# Altium PCB Main.PcbDoc
Units mm, origin at the board's own origin, x right, y up, seen from the top; angles counter-clockwise.
Board outline 99 x 79 mm, 4 copper layers (Top Layer, Ground Layer, Power Layer, Bottom Layer), stack 1.591 mm thick; 37 components, 53 nets, 178 pads, 2 vias.
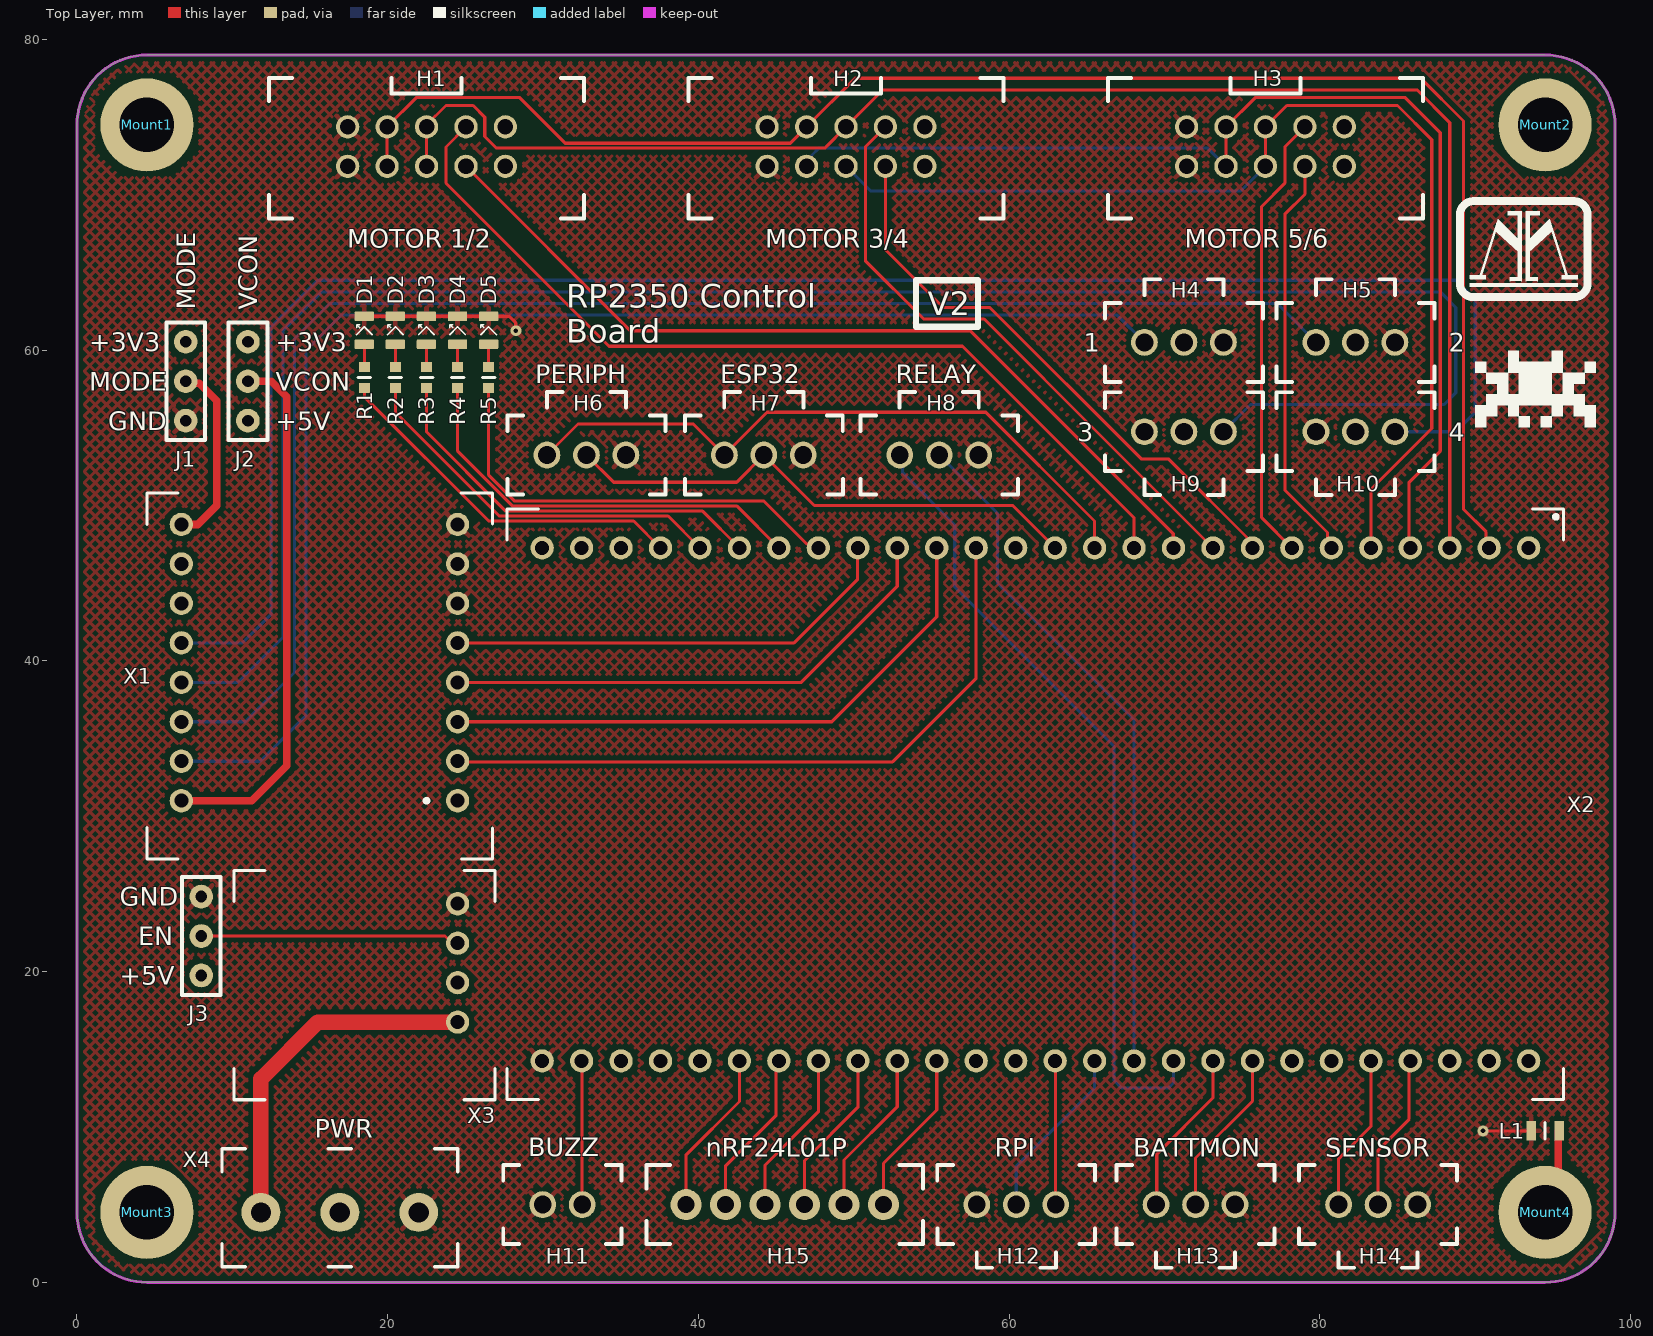
[diagram p0: Top Layer view]
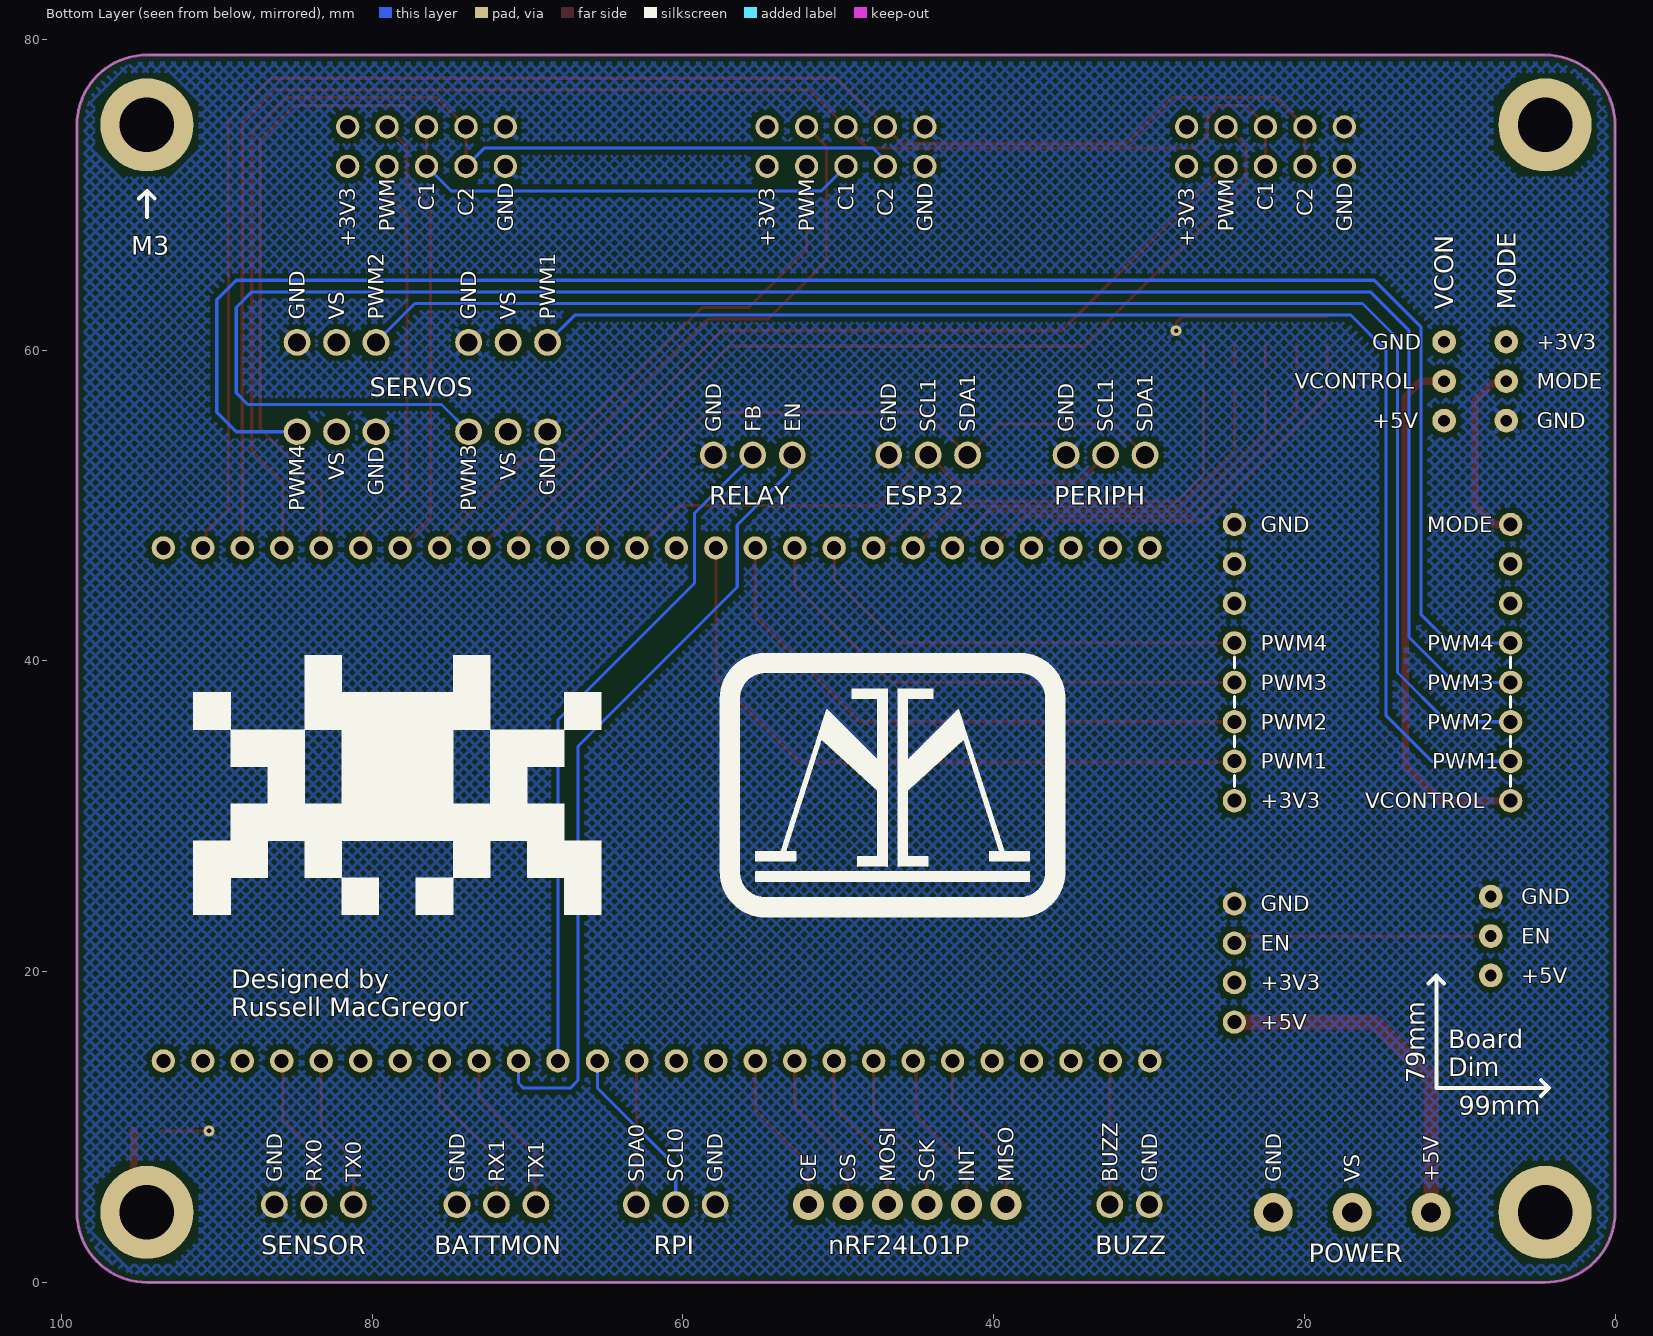
[diagram p1: Bottom Layer view, seen from below]
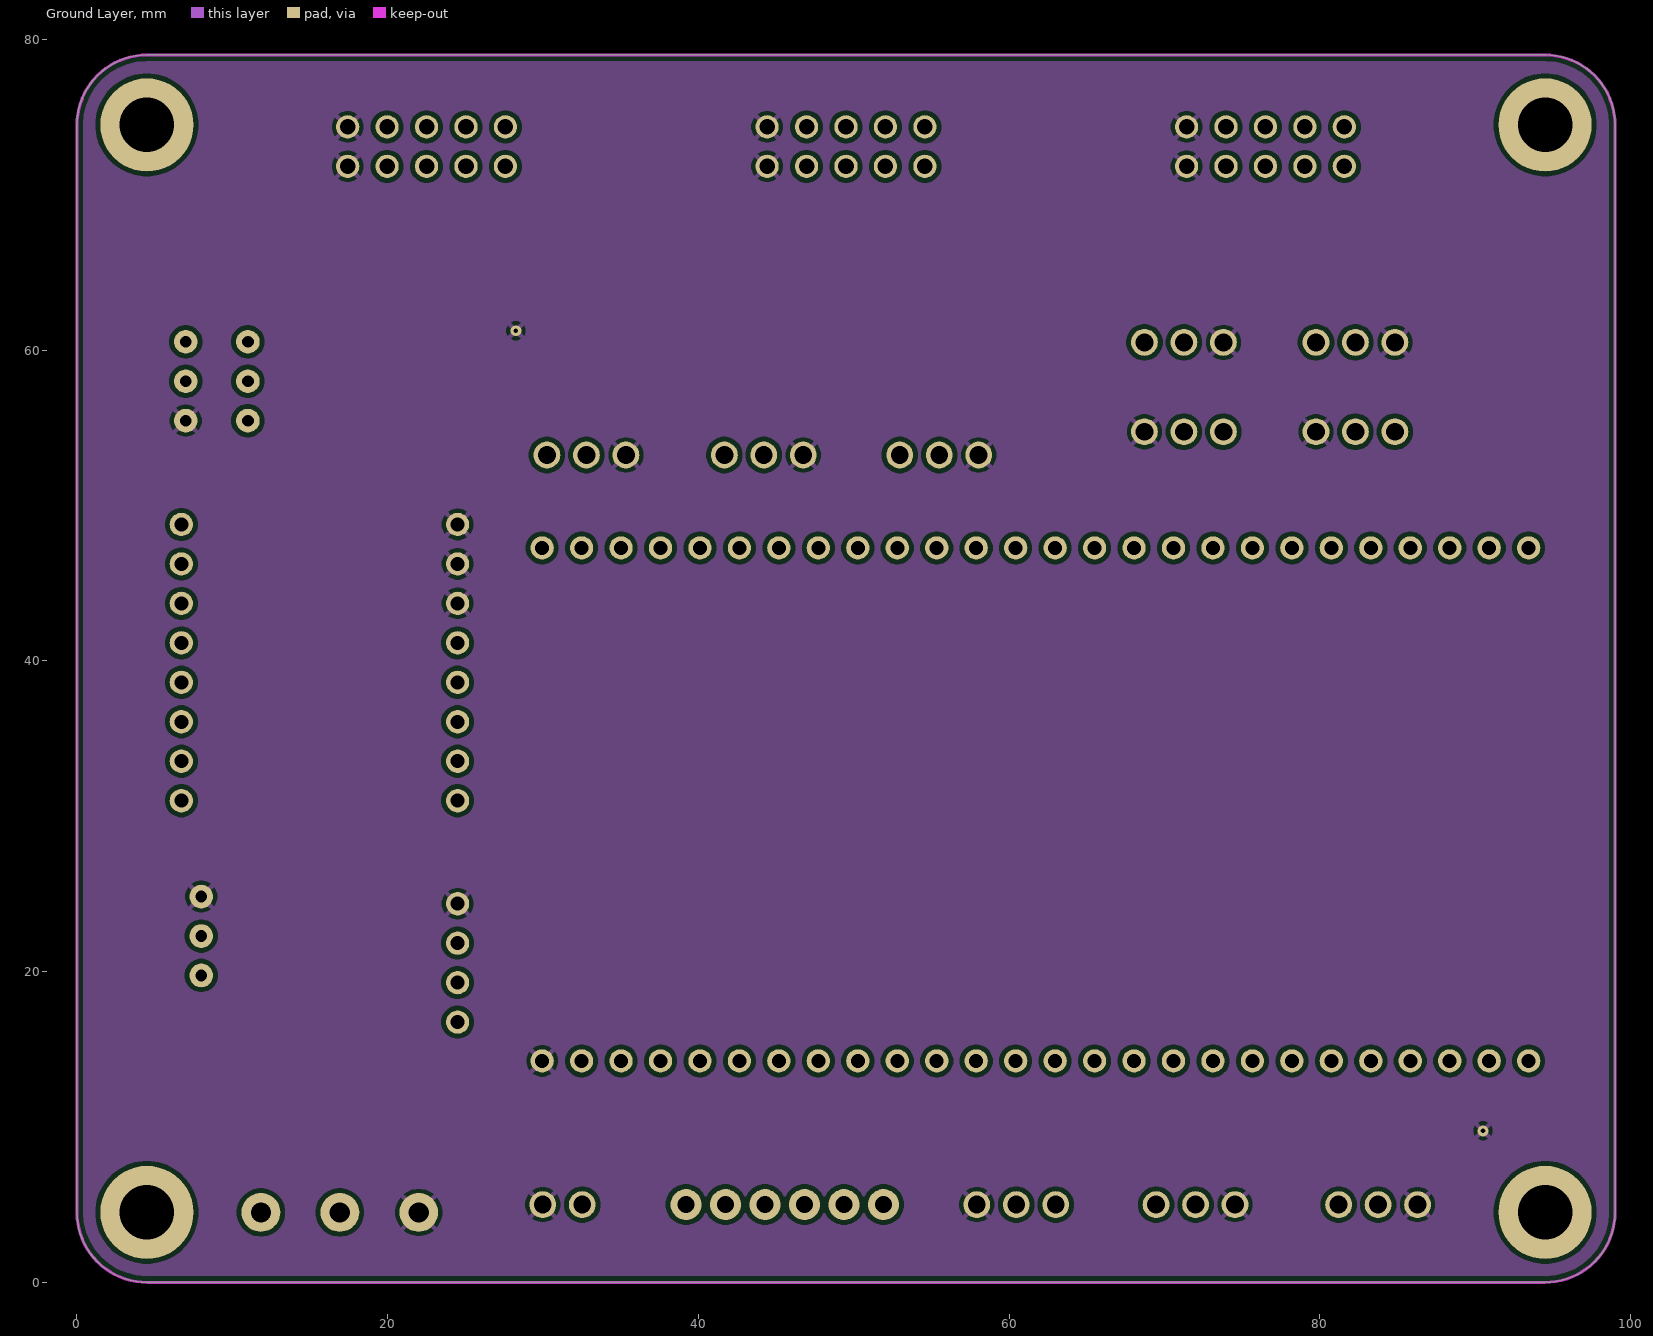
[diagram p2: Ground Layer]
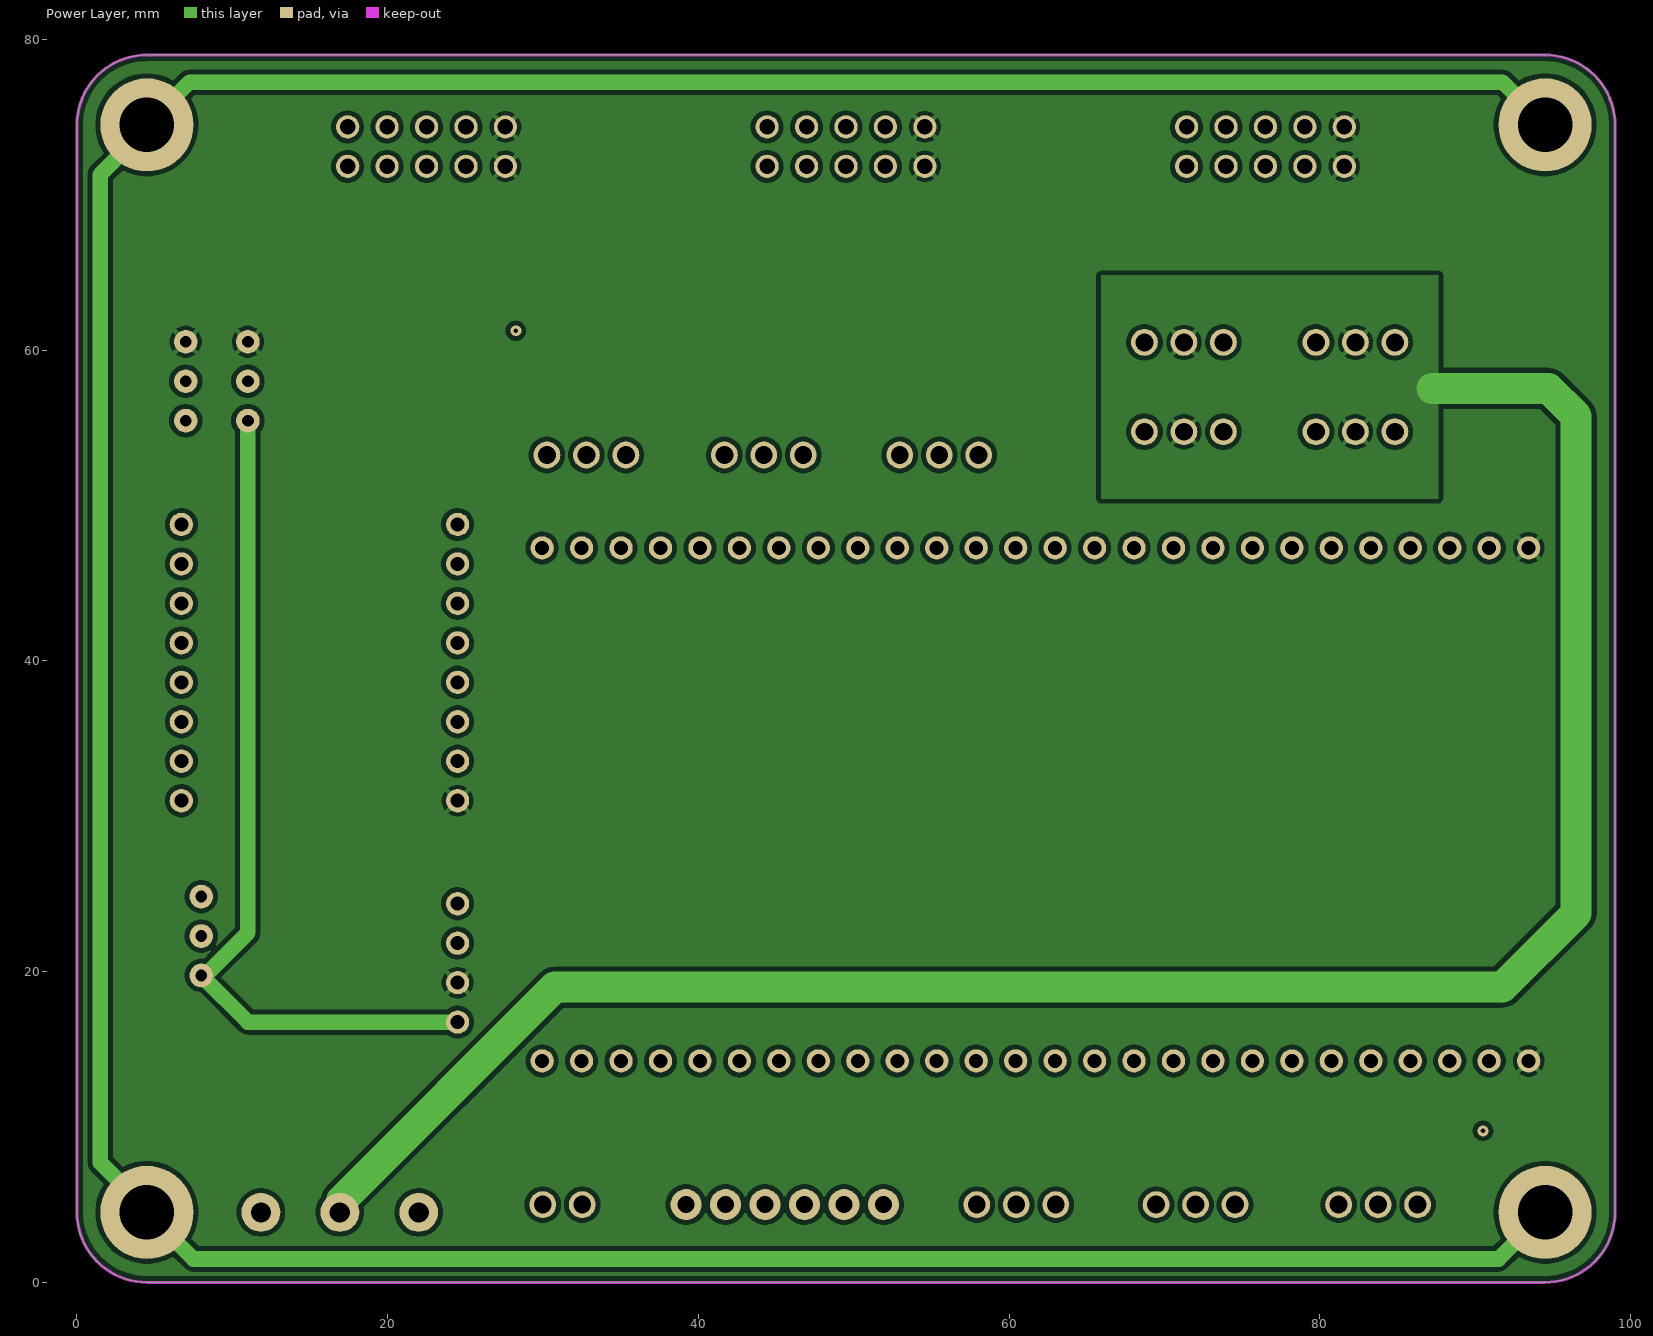
[diagram p3: Power Layer]
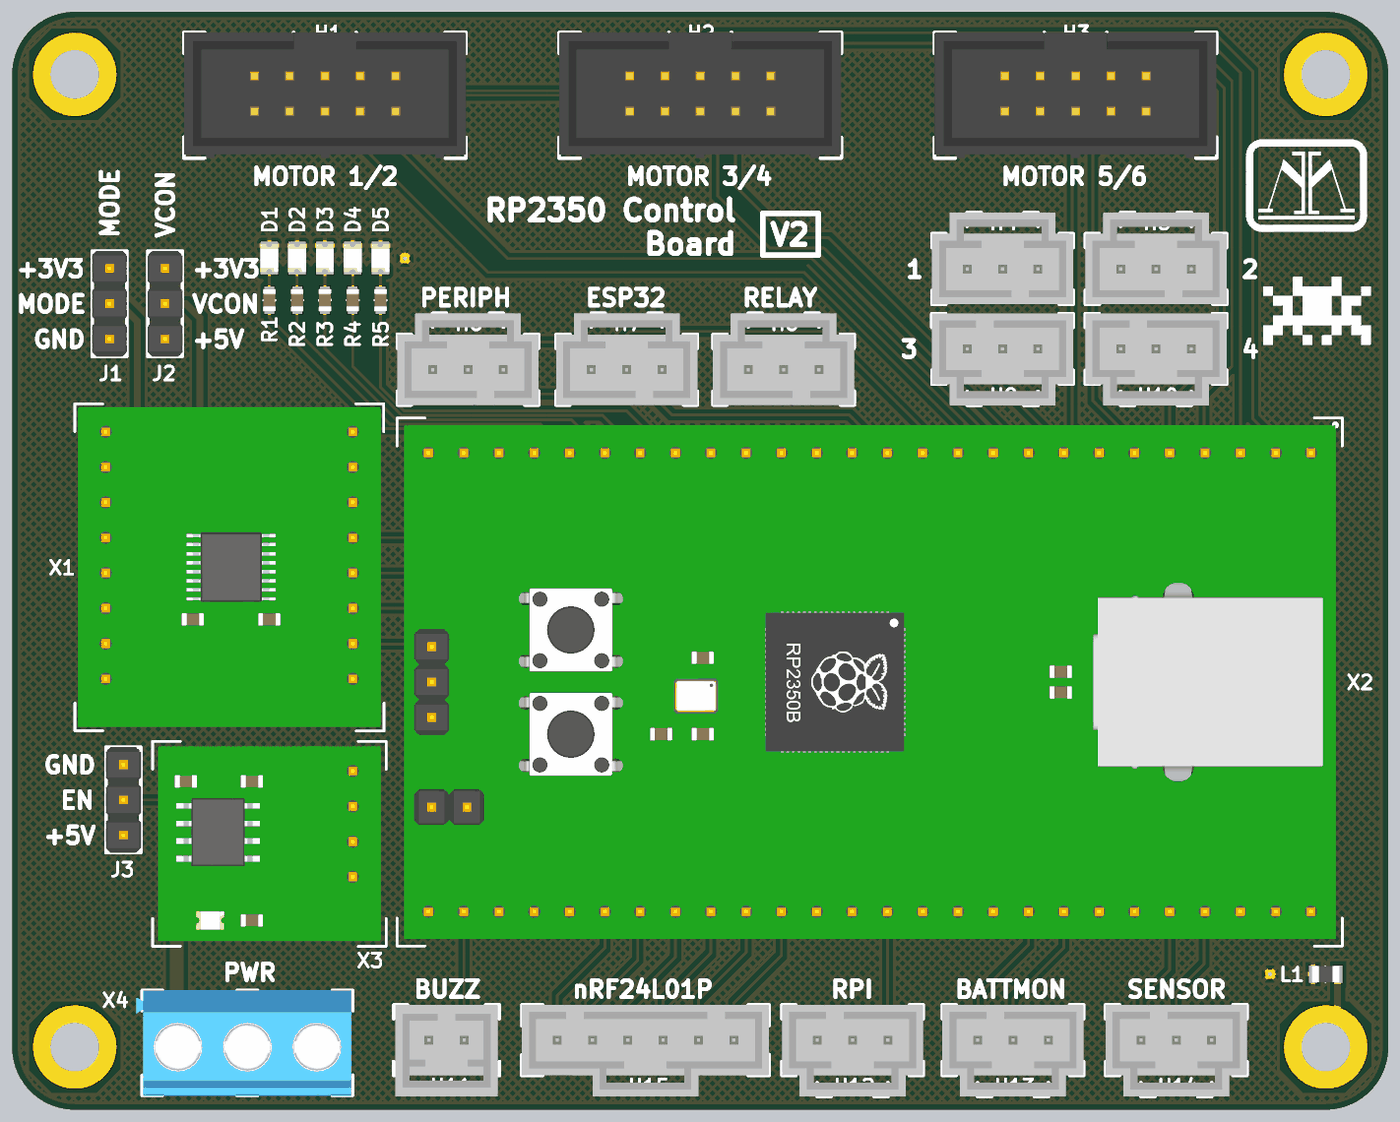
[diagram p4: 3D render of the assembled board from above, using the file's embedded part models]

## Layer stack, top to bottom
Top Solder: solder mask 0.0102, Solder Resist, Dk 3.8
Top Layer: signal copper 0.035
Dielectric 2: prepreg 0.2104, 7628*1, Dk 4.4
Ground Layer: signal copper 0.0175
Dielectric 1: dielectric 1.065, FR-4, Dk 4.8
Power Layer: signal copper 0.0175
Dielectric 3: prepreg 0.2104, 7628*1, Dk 4.4
Bottom Layer: signal copper 0.035
Bottom Solder: solder mask 0.0102, Solder Resist, Dk 3.8

## Board outline
0,4.5 0,74.5 cw(c4.5,74.5) 4.5,79 94.5,79 cw(c94.5,74.5) 99,74.5 99,4.5 cw(c94.5,4.5) 94.5,0 4.5,0 cw(c4.5,4.5)

## Design rules (kind name [scope] priority, off if disabled: settings)
BoardOutlineClearance [All] p1: gap=0.2 ignorepadtopadclearanceinfootprint=FALSE
Clearance "inPolygon Clearance" [InPolygon] p1: gap=0.3 ignorepadtopadclearanceinfootprint=TRUE // this rule ensures that every net within a polygon of a different net has a set clearance from the poly
Clearance "Different Diff Pair" [All] p2: gap=0.2 ignorepadtopadclearanceinfootprint=TRUE
Clearance "Same Diff Pair" [All] p3: gap=0.1 ignorepadtopadclearanceinfootprint=TRUE
Clearance "Different Nets" [not InAnyDifferentialPair] p4: gap=0.3 ignorepadtopadclearanceinfootprint=TRUE except(0.1: Arc-SMDPad Arc-THPad Arc-Via Arc-Text Track-SMDPad Track-THPad Track-Via Track-Text SMDPad-Text THPad-Text Via-Text Fill-Text Poly-Text Region-Text Text-Text; 0.12: Arc-Arc Arc-Track Track-Track; 0.15: SMDPad-SMDPad SMDPad-THPad SMDPad-Via THPad-THPad THPad-Via Via-Via; 0.2: Arc-Hole Track-Hole SMDPad-Hole THPad-Hole Via-Hole Fill-Hole Poly-Hole Region-Hole Text-Hole)
Clearance "Same Net" [not InAnyDifferentialPair] p5: gap=0 ignorepadtopadclearanceinfootprint=TRUE except(0.1: THPad-Via; 0.18: Arc-Arc Arc-Track Track-Track)
ComponentClearance [All] p1: gap=0.102 collisioncheckmode=3 verticalgap=0.102 showdistances=TRUE
DiffPairsRouting "Ethernet Routing" [InDifferentialPairClass('Ethernet_Pairs')] p1: maxlimit=0.25 minlimit=0.2 mostfreqgap=0.25 toplayer_maxgap=0.2 toplayer_prefgap=0.2 toplayer_minwidth=0.25 toplayer_maxwidth=0.25 toplayer_prefwidth=0.25 midlayer1_mingap=0.25 midlayer1_minwidth=0.19 midlayer1_maxwidth=0.19 midlayer1_prefwidth=0.19 midlayer2_mingap=0.25 midlayer2_minwidth=0.19 midlayer2_maxwidth=0.19 midlayer2_prefwidth=0.19 bottomlayer_maxgap=0.2 bottomlayer_prefgap=0.2 bottomlayer_minwidth=0.25 bottomlayer_maxwidth=0.25 bottomlayer_prefwidth=0.25 impedanceprofiledriven=TRUE maxuncoupledlength=12.7
DiffPairsRouting "USB Routing" [InDifferentialPairClass('USB_Pairs')] p2: maxlimit=0.291 minlimit=0.127 mostfreqgap=0.291 toplayer_maxgap=0.127 toplayer_prefgap=0.127 toplayer_minwidth=0.23 toplayer_maxwidth=0.23 toplayer_prefwidth=0.23 midlayer1_mingap=0.291 midlayer1_minwidth=0.25 midlayer1_maxwidth=0.25 midlayer1_prefwidth=0.25 midlayer2_mingap=0.291 midlayer2_minwidth=0.25 midlayer2_maxwidth=0.25 midlayer2_prefwidth=0.25 bottomlayer_maxgap=0.127 bottomlayer_prefgap=0.127 bottomlayer_minwidth=0.23 bottomlayer_maxwidth=0.23 bottomlayer_prefwidth=0.23 impedanceprofiledriven=TRUE impedanceprofileid={D3891781-6BB8-410D-9E8F-5E20BD3741C5} impedanceprofilevalue=90.000000 maxuncoupledlength=12.7
DiffPairsRouting "CAN Routing" [InDifferentialPairClass('CAN_Pairs')] p3: maxlimit=0.907 minlimit=0.5 mostfreqgap=0.907 toplayer_maxgap=0.5 toplayer_prefgap=0.5 toplayer_minwidth=0.201 toplayer_maxwidth=0.201 toplayer_prefwidth=0.201 midlayer1_mingap=0.907 midlayer1_minwidth=0.155 midlayer1_maxwidth=0.155 midlayer1_prefwidth=0.155 midlayer2_mingap=0.907 midlayer2_minwidth=0.155 midlayer2_maxwidth=0.155 midlayer2_prefwidth=0.155 bottomlayer_maxgap=0.5 bottomlayer_prefgap=0.5 bottomlayer_minwidth=0.201 bottomlayer_maxwidth=0.201 bottomlayer_prefwidth=0.201 impedanceprofiledriven=TRUE maxuncoupledlength=12.7
Height [All] p1: minheight=0 maxheight=1816.048 prefheight=12.7
HoleSize [All] p1: absolutevalues=TRUE maxlimit=6.3 minlimit=0.3 maxpercent=80.000 minpercent=20.000
HoleToHoleClearance [All] p1: gap=0.25 allowstackedmicrovias=FALSE
Length [All] p1: maxlimit=43.432 minlimit=0 usedelayunits=TRUE mindelay=0.000000 maxdelay=10000.000000
MatchedLengths "Diff Pair Matched Delays" [InDifferentialPairClass('Ethernet_Pairs') or InDifferentialPairClass('USB_Pairs') or InDifferentialPairClass('CAN_Pairs')] p1: tolerance=5 checknetsindiffpair=TRUE checkdiffpairvsdiffpair=FALSE checkxsignals=FALSE checkothers=FALSE usedelayunits=TRUE delaytolerance=100.000000
MinimumAnnularRing [All] p1: minimumring=0.2
MinimumSolderMaskSliver [All] p1: minsoldermaskwidth=0
PlaneClearance "Supply Net Clearance" [InNetClass('Supply_Nets')] p1: clearance=0.5
PlaneClearance "All Nets" [All] p2: clearance=0.3
PolygonConnect "Supply Nets" [InNetClass('Supply_Nets')] p1: connectstyle=Relief reliefconductorwidth=0.3 reliefentries=4 polygonreliefangle="90 Angle" conductorbypadedge=TRUE mindistance=0.381 enablemindistance=FALSE airgapwidth=0.254
PolygonConnect General [All] p2: connectstyle=Relief reliefconductorwidth=0.254 reliefentries=4 polygonreliefangle="90 Angle" airgapwidth=0.254
RoutingVias [All] p1: holewidth=0.2 width=0.35 viastyle="Through Hole" minholewidth=0.15 minwidth=0.3 maxholewidth=6.3 maxwidth=6.55
SilkToSilkClearance [All] p1: silktosilkclearance=0
SilkToSolderMaskClearance [All] p1: minsilkscreentomaskgap=0 clearancetoexposedcopper=TRUE
SolderMaskExpansion [All] p1: expansion=0.075 istentingtop=FALSE
SupplyNets "Schematic Supply Nets_5" [InNet('Vservo')] p1: voltage=0.000
SupplyNets "Schematic Supply Nets_3" [InNet('GND')] p2: voltage=0.000
SupplyNets "Schematic Supply Nets_2" [InNet('+5V')] p3: voltage=0.000
SupplyNets "Schematic Supply Nets_7" [InNet('+3V3')] p4: voltage=0.000
SupplyNets "Schematic Supply Nets_1" [InNet('Earth')] p5: voltage=0.000
UnRoutedNet [All] p1: checkbadconnections=TRUE
Width "nRF Width" [InNetClass('nRF Signal')] p1: maxlimit=0.379 minlimit=0.263 preferedwidth=0.379 toplayer_minwidth=0.379 midlayer1_maxwidth=0.263 midlayer1_prefwidth=0.263 midlayer2_maxwidth=0.263 midlayer2_prefwidth=0.263 bottomlayer_minwidth=0.379 impedanceprofiledriven=TRUE minimp=50.000000 maximp=50.000000 favimp=50.000000 checkconnectedcopper=TRUE
Width [All] p2: maxlimit=100 minlimit=0.1 preferedwidth=0.3
20 further rules are at their usual default settings.

## Classes and differential pairs
net class Supply_Nets: +3V3 +5V Earth GND "Vreg EN" Vservo
component class Connections: D1 D2 D3 D4 D5 H1 H2 H3 H4 H5 H6 H7 H8 H9 H10 H11 H12 H13 H14 H15 R1 R2 R3 R4 R5
component class "Board ConnectionsSchDoc": J1 J2 J3 L1 Mount1 Mount2 Mount3 Mount4 X1 X2 X3 X4

## Components (designator, comment, footprint, x,y, rotation, side; value= is the part's Value field where it differs from the comment)
D1 "[LED] SMD 0805 Green" "[LED] SMD 0805" 18.496,61.28 r90 top
D2 "[LED] SMD 0805 Yellow" "[LED] SMD 0805" 20.496,61.28 r90 top
D3 "[LED] SMD 0805 Red" "[LED] SMD 0805" 22.496,61.28 r90 top
D4 "[LED] SMD 0805 Blue" "[LED] SMD 0805" 24.496,61.28 r90 top
D5 "[LED] SMD 0805 Blue" "[LED] SMD 0805" 26.496,61.28 r90 top
H1 "2x5 Shrouded" "[Header] Shrouded 2x5 Male" 22.5,73 r180 top
H2 "2x5 Shrouded" "[Header] Shrouded 2x5 Male" 49.5,73 r180 top (schematic designator H5)
H3 "2x5 Shrouded" "[Header] Shrouded 2x5 Male" 76.5,73 r180 top (schematic designator H7)
H4 "1x3 Male" "[Header] Shrouded 1x3 Male" 71.25,60.5 r0 top (schematic designator H10)
H5 "1x3 Male" "[Header] Shrouded 1x3 Male" 82.29,60.5 r0 top (schematic designator H14)
H6 "1x3 Male" "[Header] Shrouded 1x3 Male" 32.79,53.25 r0 top (schematic designator H13)
H7 "1x3 Male" "[Header] Shrouded 1x3 Male" 44.21,53.25 r0 top (schematic designator H12)
H8 "1x3 Male" "[Header] Shrouded 1x3 Male" 55.5,53.25 r0 top
H9 "1x3 Male" "[Header] Shrouded 1x3 Male" 71.25,54.75 r180 top (schematic designator H11)
H10 "1x3 Male" "[Header] Shrouded 1x3 Male" 82.29,54.75 r180 top (schematic designator H15)
H11 "1x2 Male" "[Header] Shrouded 1x2 Male" 31.25,5 r180 top (schematic designator H9)
H12 "1x3 Male" "[Header] Shrouded 1x3 Male" 60.46,5 r180 top (schematic designator H4)
H13 "1x3 Male" "[Header] Shrouded 1x3 Male" 72,5 r180 top (schematic designator H2)
H14 "1x3 Male" "[Header] Shrouded 1x3 Male" 83.75,5 r180 top (schematic designator H3)
H15 "[Header] Shrouded 1x6 Male" "[Header] Shrouded 1x6 Male" 45.56,5 r180 top (schematic designator H6)
J1 "[Jumper] Thru-Hole 3pin" "[Jumper] Thru-Hole 3pin" 7,58 r270 top
J2 "[Jumper] Thru-Hole 3pin" "[Jumper] Thru-Hole 3pin" 11,58 r270 top
J3 "[Jumper] Thru-Hole 3pin" "[Jumper] Thru-Hole 3pin" 8,22.29 r90 top
L1 "652-MH2029-300Y" "[Ferrite] SMD 0805" 94.5,9.75 r180 top
Mount1 "M3 Mount Hole" "[Mount] M3 Mount Hole" 4.5,74.5 r0 top
Mount2 "M3 Mount Hole" "[Mount] M3 Mount Hole" 94.5,74.5 r0 top
Mount3 "M3 Mount Hole" "[Mount] M3 Mount Hole" 4.5,4.5 r0 top
Mount4 "M3 Mount Hole" "[Mount] M3 Mount Hole" 94.5,4.5 r0 top
R1 "[220] SMD 0603 1% 1/10W" "[Res] SMD 0603" 18.5,58.25 r90 top
R2 "[220] SMD 0603 1% 1/10W" "[Res] SMD 0603" 20.5,58.25 r90 top
R3 "[220] SMD 0603 1% 1/10W" "[Res] SMD 0603" 22.5,58.25 r90 top
R4 "[1k] SMD 0603 1% 1/10W" "[Res] SMD 0603" 24.5,58.25 r90 top
R5 "[1k] SMD 0603 1% 1/10W" "[Res] SMD 0603" 26.5,58.25 r90 top
X1 "[Level Shifter] MC14504BDTR2G Breakout" "[Level Shifter] MC14504BDTR2G Breakout" 24.5,31 r180 top
X2 "RP2350" "[Pi] RP2350B Breakout" 93.44,47.27 r270 top (schematic designator X3)
X3 "[Reg] 3V3 Linear Reg Breakout" "[Reg] 3V3 Linear Reg Breakout" 24.5,16.75 r180 top (schematic designator X4)
X4 "3pin Screw Terminal" "[Screw Terminal] 3pin 5mm" 16.92,4.5 r0 top (schematic designator X2)

## Footprints (in the part's own frame and the unit in brackets; to place one, negate y for a bottom-side part, rotate by r counter-clockwise, add the part's x,y. Pads: shape width x height; smd on the part's side, far side on the other; paste and mask are expansions set on the pad)
"[Ferrite] SMD 0805" [mm]
  rect 0.6x1.25 smd: 1(-0.9,0) 2(0.9,0)
  silkscreen extent 0,-0.53 0,0.53, body extent -1,-0.6 1,0.6, height 1.1
"[Header] Shrouded 1x2 Male" [mm]
  round 1.725 hole 1.15: 1(-1.27,0) 2(1.27,0)
  silkscreen extent -3.81,-2.54 3.81,2.54, body extent -3.68,-2.54 3.68,4.06, height 11.71
"[Header] Shrouded 1x3 Male" [mm] "070543-0037 / Mates with 005057-9403"
  round 1.725 hole 1.15: 1(-2.54,0) 2(0,0) 3(2.54,0)
  silkscreen extent -5.08,-2.54 5.09,4.06, body extent -5.08,-2.54 5.08,4.06, height 11.67
"[Header] Shrouded 1x6 Male" [mm]
  round 2 hole 1.1: 1(-6.35,0) 2(-3.81,0) 3(-1.27,0) 4(1.27,0) 5(3.81,0) 6(6.35,0)
  silkscreen extent -8.9,-2.54 8.9,2.54, body extent -8.89,-2.54 8.89,4.06, height 11.49
"[Header] Shrouded 2x5 Male" [mm]
  round 1.5 hole 1: 1(-5.08,-1.37) 2(-5.08,1.17) 3(-2.54,-1.37) 4(-2.54,1.17) 5(0,-1.37) 6(0,1.17) 7(2.54,-1.37) 8(2.54,1.17) 9(5.08,-1.37) 10(5.08,1.17)
  silkscreen extent -10.15,-4.52 10.15,4.52, body extent -10.15,-4.52 10.15,4.52, height 8.8
"[Jumper] Thru-Hole 3pin" [mil]
  round 60 hole 30: 1(-100,0) 2(0,0) 3(100,0)
  silkscreen extent -149,-49 149,49, body extent -150,-50 150,50, height 374
"[LED] SMD 0805" [mm]
  rrect20% 0.6x1.25 smd: 1(-0.9,0) 2(0.9,0)
  silkscreen extent -0.28,-0.51 0.37,0.51, body extent -1,-0.65 1,0.65, height 0.8
"[Level Shifter] MC14504BDTR2G Breakout" [mm]
  round 1.5 hole 0.9: 1(0,0) 2(0,-2.54) 3(0,-5.08) 4(0,-7.62) 5(0,-10.16) 6(0,-12.7) 7(0,-15.24) 8(0,-17.78) 9(17.78,-17.78) 10(17.78,-15.24) 11(17.78,-12.7) 12(17.78,-10.16) 13(17.78,-7.62) 14(17.78,-5.08) 15(17.78,-2.54) 16(17.78,0)
  silkscreen extent -2.25,-19.8 19.99,3.75, body extent -2,-19.53 19.78,3.47, height 6.04
"[Mount] M3 Mount Hole" [mm] "Place at least 4.5mm from board edge. Plated."
  round 6 hole 3.5: 1(0,0)
"[Pi] RP2350B Breakout" [mm]
  round 1.5 hole 0.9: 1(0,0) 2(0,-2.54) 3(0,-5.08) 4(0,-7.62) 5(0,-10.16) 6(0,-12.7) 7(0,-15.24) 8(0,-17.78) 9(0,-20.32) 10(0,-22.86) 11(0,-25.4) 12(0,-27.94) 13(0,-30.48) 14(0,-33.02) 15(0,-35.56) 16(0,-38.1) 17(0,-40.64) 18(0,-43.18) 19(0,-45.72) 20(0,-48.26) 21(0,-50.8) 22(0,-53.34) 23(0,-55.88) 24(0,-58.42) 25(0,-60.96) 26(0,-63.5) 27(33.02,-63.5) 28(33.02,-60.96) 29(33.02,-58.42) 30(33.02,-55.88) 31(33.02,-53.34) 32(33.02,-50.8) 33(33.02,-48.26) 34(33.02,-45.72) 35(33.02,-43.18) 36(33.02,-40.64) 37(33.02,-38.1) 38(33.02,-35.56) 39(33.02,-33.02) 40(33.02,-30.48) 41(33.02,-27.94) 42(33.02,-25.4) 43(33.02,-22.86) 44(33.02,-20.32) 45(33.02,-17.78) 46(33.02,-15.24) 47(33.02,-12.7) 48(33.02,-10.16) 49(33.02,-7.62) 50(33.02,-5.08) 51(33.02,-2.54) 52(33.02,0)
  silkscreen extent -2.5,-65.75 35.5,2.25, body extent -2,-65.25 35,1.75, height 15.2
"[Reg] 3V3 Linear Reg Breakout" [mm]
  round 1.5 hole 0.9: 1(0,0) 2(0,-2.54) 3(0,-5.08) 4(0,-7.62)
  silkscreen extent -2.4,-9.75 14.4,5, body extent -2,-9.37 14,4.63, height 6.29
"[Res] SMD 0603" [mm]
  rect 0.65x0.7 smd: 1(-0.675,0) 2(0.675,0)
  silkscreen extent 0,-0.4 0,0.4, body extent -0.8,-0.45 0.8,0.45, height 0.8
"[Screw Terminal] 3pin 5mm" [mm]
  round 2.5 hole 1.3: 1(-5.08,0) 2(0,0) 3(5.08,0)
  silkscreen extent -7.59,-3.5 7.59,4.1, body extent -8,-3.5 7.5,4.1, height 10

## Part data
D1: "LG R971-KN-1-0-20-R18", Color=Green, Size Package=0805, Supplier Part Number 1=475-LGR971-KN-1CT-ND, Supplier 1=DigiKey
D2: "LY R976-PS-36-0-20-R18", Color=Yellow, Size Package=0805, Supplier Part Number 1=475-LYR976-PS-36-0-20-R18CT-ND, Supplier 1=DigiKey
D3: "LS R976-NR-1-0-20-R18", Color=Red, Size Package=0805, Supplier Part Number 1=475-LSR976-NR-1CT-ND, Supplier 1=DigiKey
D4 D5: "150080BS75000", Color=Blue, Size Package=0805, Supplier Part Number 1=732-4982-1-ND, Supplier 1=DigiKey
H1 H2 H3: library part "[Header] Shrouded 2x5 Male", "BHR-10-VUA", Supplier Part Number 1=2057-BHR-10-VUA-ND, Supplier 1=DigiKey
H4 H5 H6 H7 H8 H9 H10 H12 H13 H14: library part "[Header] Shrouded 1x3 Male", "070543-0037 / Mates with 005057-9403", Supplier Part Number 1=WM4825-ND, Supplier 1=DigiKey
  H4 H5 H6 H7 H8 H9 H10 H12 H14: Supplier 2=DigiKey, Supplier Part Number 2=WM2901-ND
H11: library part "[Header] Shrouded 1x2 Male", "0705430036 / Mates with 0050579402", Supplier Part Number 1=WM4824-ND, Supplier 1=DigiKey, Supplier 2=DigiKey, Supplier Part Number 2=WM2900-ND
H15: "0705430005 / Mates with 0050579406", Supplier Part Number 1=WM4804-ND, Supplier 1=DigiKey, Supplier 2=DigiKey, Supplier Part Number 2=WM2904-ND
L1: library part "[Ferrite] SMD 0805 3A 30ohm", Res @ Freq="30 @ 100MHz", Size Package=0805, Supplier Part Number 1=MH2029-300YCT-ND, Supplier 1=DigiKey
Mount1 Mount2 Mount3 Mount4: library part "[Mount] M3 Mount Hole", "Place at least 4.5mm from board edge. Plated."
R1 R2 R3: "CRGCQ0805F220R", Resistance=220, Size Package=0603, Supplier Part Number 1=A129741CT-ND, Tolerance=1%, Supplier 1=DigiKey, Wattage=1/8W
R4 R5: "RMCF0603FT1K00", Resistance=1k, Size Package=0603, Supplier Part Number 1=RMCF0603FT1K00DKR-ND, Tolerance=1%, Supplier 1=DigiKey, Wattage=1/10W
X1: "Custom MIL Part", Supplier Part Number 1=MC14504BDTR2GOSCT-ND, Supplier 1=DigiKey
X2: library part "[Pi] RP2350B Breakout", "Custom MIL Part"
X3: "Custom MIL Part"
X4: library part "[Screw Terminal] 3pin", Supplier Part Number 1=102-6162-ND, Supplier 1=DigiKey

## Via types
v1: diameter 0.7, hole 0.3, Top Layer to Bottom Layer, 2 vias

## Nets (pads, with @x,y where several pads share a name; then routed paths per layer and width w, separated by ;. In a path a pad name is that pad's centre, name@x,y a point inside that pad or via, vN(x,y) a via of type N, cw(c..) or ccw(c..) an arc to the next point about the centre after c; other vN are vias at no path point)
+3V3: H1.1 H1.2 H2.1 H2.2 H3.1 H3.2 J1.1 J2.1 X1.1 X2.1 X2.52 X3.2
+5V: J2.3 J3.1 X3.1 X4.1 | length 77.6
  Top Layer w1: X4.1 11.84,13.09 15.5,16.75 X3.1
  Power Layer w1: J2.3 11,22.5 8.512,20.012 8.404,20.012 8.142,19.75 J3.1 11,16.75 X3.1
Buzzer: H11.1 X2.28 | length 9.3
  Top Layer w0.2: X2.28 32.5,14.23 32.5,5.02 H11.1
Earth: L1.1 Mount1.1 Mount2.1 Mount3.1 Mount4.1 | length 262.9
  Top Layer w0.5: Mount4.1 95.35,5.35 95.35,9.7 L1.1
  Power Layer w1: Mount4.1 91.5,1.5 7.5,1.5 Mount3.1 4.5,4.704 1.5,7.704 1.5,71.296 4.5,74.296 Mount1.1 7.25,77.25 91.75,77.25 Mount2.1
GND: D1.2 D2.2 D3.2 D4.2 D5.2 H1.9 H1.10 H2.9 H2.10 H3.9 H3.10 H4.3 H5.3 H6.3 H7.3 H8.3 H9.3 H10.3 H11.2 H12.3 H13.1 H14.1 J1.3 J3.3 L1.2 X1.6 X1.7 X1.8 X2.27 X3.4 X4.3 | length 13.5
  Top Layer w0.2: D1.2 D2.2 D3.2 D4.2 D5.2 27.82,62.18 28.245,61.755 28.245,61.255 v1(28.25,61.25) ; v1(90.5,9.75) L1.2
LED1: R1.1 X2.23 | length 23.7
  Top Layer w0.2: R1.1 18.5,57 26.5,49 35.83,49 X2.23
LED2: R2.1 X2.22 | length 24.8
  Top Layer w0.2: R2.1 20.5,56 27.18,49.32 38.05,49.32 X2.22
LED3: R3.1 X2.21 | length 26.1
  Top Layer w0.2: R3.1 22.5,54.75 27.61,49.64 40.27,49.64 X2.21
LED4: R4.1 X2.20 | length 27.3
  Top Layer w0.2: R4.1 24.5,53.5 28.04,49.96 42.49,49.96 X2.20
LED5: R5.1 X2.19 | length 28.8
  Top Layer w0.2: R5.1 26.5,51.953 28.173,50.28 44.22,50.28 46.981,47.519 47.471,47.519 X2.19
"Left Motor Control 1": H2.6 H3.5 H3.6 X2.5 | length 70.9
  Top Layer w0.2: H3.6 H3.5 77.88,75.75 85,75.75 87.205,73.545 87.205,54.955 83.28,51.03 X2.5
  Bottom Layer w0.2: H2.6 51.08,70.25 74.92,70.25 H3.6
"Left Motor Control 2": H2.8 H3.7 H3.8 X2.4 | length 73.8
  Top Layer w0.2: H3.8 H3.7 75.84,76.25 85.5,76.25 87.75,74 87.75,53.5 85.75,51.5 85.75,47.34 X2.4
  Bottom Layer w0.2: H2.8 46.96,72.182 47.308,72.53 47.308,72.558 47.75,73 72.79,73 H3.8
MODE: J1.2 X1.9 | length 12.1
  Top Layer w0.5: X1.9 7.78,48.78 9,50 9,56.75 7.878,57.872 7.128,57.872 J1.2
"Motor 1 PWM": H1.3 X2.11 | length 59.3
  Top Layer w0.2: H1.3 23.75,73.08 23.75,70.75 34.25,60.25 57,60.25 68.04,49.21 X2.11
"Motor 2 PWM": H1.4 X2.10 | length 56.2
  Top Layer w0.2: H1.4 35.62,61.25 57.5,61.25 70.561,48.189 70.561,47.289 X2.10
"Motor 3 PWM": H2.3 X2.9 | length 39.2
  Top Layer w0.2: H2.3 50.75,73.08 50.75,65.75 54.5,62 58.39,62 66.14,54.25 X2.9
"Motor 4 PWM": H2.4 X2.8 | length 37.1
  Top Layer w0.2: H2.4 52.04,66.46 55.75,62.75 58.75,62.75 68.5,53 70.25,53 75.66,47.59 X2.8
"Motor 5 PWM": H3.3 X2.7 | length 29.1
  Top Layer w0.2: X2.7 76.25,49.22 76.25,69.25 77.75,70.75 77.75,73.08 H3.3
"Motor 6 PWM": H3.4 X2.6 | length 26.3
  Top Layer w0.2: H3.4 79.04,70.04 77.75,68.75 77.75,51 80.491,48.259 80.491,47.519 X2.6
NetD1_1: D1.1 R1.2 | length 1.5
  Top Layer w0.2: D1.1 18.495,58.93 R1.2
NetD2_1: D2.1 R2.2 | length 1.5
  Top Layer w0.2: D2.1 20.495,58.93 R2.2
NetD3_1: D3.1 R3.2 | length 1.5
  Top Layer w0.2: D3.1 22.495,58.93 R3.2
NetD4_1: D4.1 R4.2 | length 1.5
  Top Layer w0.2: D4.1 24.495,58.93 R4.2
NetD5_1: D5.1 R5.2 | length 1.5
  Top Layer w0.2: D5.1 26.495,58.93 R5.2
"NRF CE": H15.1 X2.37 | length 10.7
  Top Layer w0.2: H15.1 51.91,7.66 55.34,11.09 X2.37
"NRF CS": H15.2 X2.36 | length 10.7
  Top Layer w0.2: H15.2 49.37,7.87 52.8,11.3 X2.36
"NRF INT": H15.5 X2.33 | length 10.7
  Top Layer w0.2: H15.5 41.75,7.5 45,10.75 45,14.07 X2.33
"NRF MISO": H15.6 X2.32 | length 10.7
  Top Layer w0.2: H15.6 39.21,8.21 42.64,11.64 X2.32
"NRF MOSI": H15.3 X2.35 | length 10.7
  Top Layer w0.2: H15.3 46.83,7.83 50.26,11.26 X2.35
"NRF SCK": H15.4 X2.34 | length 10.7
  Top Layer w0.2: H15.4 44.29,7.54 47.72,10.97 X2.34
Relay_EN: H8.1 X2.43 | length 51.6
  Bottom Layer w0.2: H8.1 53.142,53.068 53.142,52.108 56.5,48.75 56.5,44.75 66.75,34.5 66.75,13 67.25,12.5 70.25,12.5 70.58,12.83 X2.43
Relay_FB: H8.2 X2.42 | length 44.2
  Bottom Layer w0.2: H8.2 59.25,49.5 59.25,45 68.04,36.21 X2.42
"Right Motor Control 1": H1.5 H1.6 H2.5 X2.3 | length 100.7
  Top Layer w0.2: H1.6 H1.5 22.5,74.5 23.75,75.75 25.5,75.75 26.25,75 26.25,73.75 27,73 48.13,73 H2.5 51.88,76.75 86.25,76.75 88.36,74.64 X2.3
"Right Motor Control 2": H1.7 H1.8 H2.7 X2.2 | length 104.9
  Top Layer w0.2: H1.8 H1.7 21.84,76.25 28.5,76.25 31.43,73.32 45.91,73.32 H2.7 50.09,77.5 86.5,77.5 89.25,74.75 89.25,49.75 90.7,48.3 90.7,47.47 X2.2
SCL0: H12.2 X2.41 | length 11.3
  Bottom Layer w0.2: H12.2 60.46,7.46 65.5,12.5 X2.41
SCL1: H6.2 H7.2 X2.13 | length 34.1
  Top Layer w0.2: H6.2 34.54,51.5 42.46,51.5 H7.2 47.46,50 60.23,50 X2.13
SDA0: H12.1 X2.40 | length 9.3
  Top Layer w0.2: X2.40 62.98,14.23 62.98,5.02 H12.1
SDA1: H6.1 H7.1 X2.12 | length 42.7
  Top Layer w0.2: H6.1 32.25,55.25 39.67,55.25 H7.1 44.42,56 58.5,56 65.5,49 X2.12
"Servo 1 PWM": X1.2 X2.15 | length 44
  Top Layer w0.2: X1.2 24.54,33.5 52.5,33.5 57.88,38.88 X2.15
"Servo 1 PWM (Vcontrol)": H4.1 X1.15 | length 88.4
  Bottom Layer w0.2: X1.15 11.79,33.54 14.75,36.5 14.75,60 17,62.25 66.96,62.25 H4.1
"Servo 2 PWM": X1.3 X2.16 | length 38.1
  Top Layer w0.2: X1.3 48.58,36.08 55.34,42.84 X2.16
"Servo 2 PWM (Vcontrol)": H5.1 X1.14 | length 97.8
  Bottom Layer w0.2: X1.14 10.83,36.08 14,39.25 14,60.75 16.25,63 77.25,63 H5.1
"Servo 3 PWM": X1.4 X2.17 | length 33.3
  Top Layer w0.2: X1.4 46.62,38.62 52.8,44.8 X2.17
"Servo 3 PWM (Vcontrol)": H9.1 X1.13 | length 125.9
  Bottom Layer w0.2: X1.13 10.37,38.62 13.25,41.5 13.25,61.25 15.75,63.75 87.75,63.75 88.75,62.75 88.75,57.25 88,56.5 75.54,56.5 H9.1
"Servo 4 PWM": X1.5 X2.18 | length 29.5
  Top Layer w0.2: X1.5 46.16,41.16 50.25,45.25 50.25,47.26 X2.18
"Servo 4 PWM (Vcontrol)": H10.1 X1.12 | length 117.3
  Bottom Layer w0.2: X1.12 10.66,41.16 12.5,43 12.5,61.5 15.5,64.5 88.75,64.5 90,63.25 90,56 88.75,54.75 H10.1@84.79,54.75
"UART0 RX": H14.2 X2.49 | length 10.1
  Top Layer w0.2: H14.2 83.75,8.5 85.75,10.5 85.75,14.18 X2.49
"UART0 TX": H14.3 X2.48 | length 10.1
  Top Layer w0.2: H14.3 81.21,7.96 83.28,10.03 X2.48
"UART1 RX": H13.2 X2.45 | length 10.8
  Top Layer w0.2: H13.2 72,8 75.66,11.66 X2.45
"UART1 TX": H13.3 X2.44 | length 10.8
  Top Layer w0.2: H13.3 69.5,5.04 69.5,8.25 73.12,11.87 X2.44
Vcontrol: J2.2 X1.16 | length 34.4
  Top Layer w0.5: X1.16 11.25,31 13.5,33.25 13.5,57 12.5,58 J2.2
"Vreg EN": J3.2 X3.3 | length 16.7
  Top Layer w0.2: J3.2 23.688,22.29 24.148,21.83 X3.3
Vservo: H4.2 H5.2 H9.2 H10.2 X4.2 | length 130
  Power Layer w2: X4.2 17.016,4.596 17.016,5.266 30.75,19 91.75,19 96.5,23.75 96.5,55.75 94.71,57.54 87.205,57.54
pads on no net: X1.10 X1.11 X2.14 X2.24 X2.25 X2.26 X2.29 X2.30 X2.31 X2.38 X2.39 X2.46 X2.47 X2.50 X2.51

## Polygon pours and split planes (outlines as drawn)
Vservo on Power Layer "Vservo Poly" (solid, remove dead copper, pour order 0): 65.915,64.81 65.915,50.44 87.585,50.44 87.625,50.48 87.625,64.81
+3V3 on Power Layer "+3V3 Power Poly" (solid, remove dead copper, pour order 4): 0,79 0,0 99,0 99,79
GND on Ground Layer "GND Poly" (solid, remove dead copper, pour order 1): 0,79 0,0 99,0 99,79
GND on Top Layer "Top GND Poly" (hatched 45Degree grid 0.508 track 0.203, remove dead copper, pour order 3): 0,79 0,0 99,0 99,79
GND on Bottom Layer "Bottom GND Poly" (hatched 45Degree grid 0.508 track 0.203, remove dead copper, pour order 2): 0,79 0,0 99,0 99,79

## Keep-outs
Keep-Out Layer:
  the board outline again, w0.2

## Silkscreen, mask and mechanical layers (free items; w line width, h text height)
Top Overlay:
  drawing of 13 lines, arcs and shapes, not listed
  text "MOTOR 1/2" at 17.402,66.6 h1.2
  text "MOTOR 3/4" at 44.302,66.6 h1.2
  text "MOTOR 5/6" at 71.302,66.6 h1.2
  text "MODE" at 7.6,62.59 h1.2 r90
  text "VCON" at 11.6,62.59 h1.2 r90
  text "V2" at 54.75,62.25 h1.5
  text "RP2350 Control / Board" at 31.5,60.471 h1.5
  text "+3V3" at 0.801,59.94 h1.2
  text "+3V3" at 12.8,59.94 h1.2
  text "1" at 64.8,59.9 h1.2
  text "2" at 88.3,59.9 h1.2
  text "PERIPH" at 29.491,57.86 h1.2
  text "ESP32" at 41.411,57.86 h1.2
  text "RELAY" at 52.701,57.86 h1.2
  text "MODE" at 0.801,57.4 h1.2
  text "VCON" at 12.8,57.4 h1.2
  text "GND" at 2.001,54.86 h1.2
  text "+5V" at 12.8,54.86 h1.2
  text "3" at 64.4,54.15 h1.2
  text "4" at 88.3,54.15 h1.2
  text "GND" at 2.751,24.23 h1.2
  text "EN" at 3.951,21.69 h1.2
  text "+5V" at 2.751,19.15 h1.2
  text "PWR" at 15.321,9.3 h1.2
  text "BUZZ" at 29.051,8.1 h1.2
  text "nRF24L01P" at 40.462,8.09 h1.2
  text "RPI" at 59.06,8.09 h1.2
  text "BATTMON" at 68.001,8.09 h1.2
  text "SENSOR" at 80.351,8.09 h1.2
Bottom Overlay:
  drawing of 26 lines, arcs and shapes, not listed
  text "C1" at 22,68.967 h1 r270
  text "C1" at 49,68.967 h1 r270
  text "C1" at 76,68.967 h1 r270
  text "C2" at 19.46,68.634 h1 r270
  text "C2" at 46.46,68.634 h1 r270
  text "C2" at 73.46,68.634 h1 r270
  text "GND" at 16.92,67.634 h1 r270
  text "PWM" at 24.54,67.634 h1 r270
  text "GND" at 43.92,67.634 h1 r270
  text "PWM" at 51.54,67.634 h1 r270
  text "GND" at 70.92,67.634 h1 r270
  text "PWM" at 78.54,67.634 h1 r270
  text "+3V3" at 27.08,66.635 h1 r270
  text "+3V3" at 54.08,66.635 h1 r270
  text "+3V3" at 81.08,66.635 h1 r270
  text "M3" at 95.5,66.15 h1.2
  text "MODE" at 6.4,62.59 h1.2 r270
  text "VCON" at 10.4,62.59 h1.2 r270
  text "PWM1" at 68.21,61.95 h1 r270
  text "VS" at 70.75,61.95 h1 r270
  text "GND" at 73.29,61.95 h1 r270
  text "PWM2" at 79.25,61.95 h1 r270
  text "VS" at 81.79,61.95 h1 r270
  text "GND" at 84.33,61.95 h1 r270
  text "+3V3" at 5.05,60.04 h1
  text "GND" at 15.616,60.04 h1
  text "MODE" at 5.05,57.5 h1
  text "VCONTROL" at 20.614,57.5 h1
  text "SERVOS" at 80.169,57.025 h1.2
  text "GND" at 5.05,54.96 h1
  text "+5V" at 15.616,54.96 h1
  text "SDA1" at 29.75,54.7 h1 r270
  text "SCL1" at 32.29,54.7 h1 r270
  text "GND" at 34.83,54.7 h1 r270
  text "SDA1" at 41.17,54.7 h1 r270
  text "SCL1" at 43.71,54.7 h1 r270
  text "GND" at 46.25,54.7 h1 r270
  text "EN" at 52.46,54.7 h1 r270
  text "FB" at 55,54.7 h1 r270
  text "GND" at 57.54,54.7 h1 r270
  text "VS" at 70.75,51.634 h1 r270
  text "VS" at 81.79,51.634 h1 r270
  text "GND" at 68.21,50.634 h1 r270
  text "GND" at 79.25,50.634 h1 r270
  text "PERIPH" at 36.089,50.05 h1.2
  text "ESP32" at 47.009,50.05 h1.2
  text "RELAY" at 58.299,50.05 h1.2
  text "PWM3" at 73.29,49.635 h1 r270
  text "PWM4" at 84.33,49.635 h1 r270
  text "MODE" at 12.085,48.28 h1
  text "GND" at 22.8,48.28 h1
  text "PWM4" at 12.085,40.66 h1
  text "PWM4" at 22.8,40.66 h1
  text "PWM3" at 12.085,38.12 h1
  text "PWM3" at 22.8,38.12 h1
  text "PWM2" at 12.085,35.58 h1
  text "PWM2" at 22.8,35.58 h1
  text "PWM1" at 11.752,33.04 h1
  text "PWM1" at 22.8,33.04 h1
  text "VCONTROL" at 16.084,30.5 h1
  text "+3V3" at 22.8,30.5 h1
  text "GND" at 6.05,24.33 h1
  text "GND" at 22.8,23.87 h1
  text "EN" at 6.05,21.79 h1
  text "EN" at 22.8,21.33 h1
  text "+5V" at 6.05,19.25 h1
  text "+3V3" at 22.8,18.79 h1
  text "Designed by / Russell MacGregor" at 89.063,17.121 h1.2
  text "+5V" at 22.8,16.25 h1
  text "Board" at 10.75,15.05 h1.2
  text "Dim" at 10.75,13.25 h1.2
  text "79mm" at 12.25,12.826 h1.2 r270
  text "99mm" at 10.074,10.8 h1.2
  text "+5V" at 11.34,6.45 h1 r270
  text "VS" at 16.42,6.45 h1 r270
  text "GND" at 21.5,6.45 h1 r270
  text "GND" at 29.48,6.45 h1 r270
  text "BUZZ" at 32.02,6.45 h1 r270
  text "MISO" at 38.71,6.45 h1 r270
  text "INT" at 41.25,6.45 h1 r270
  text "SCK" at 43.79,6.45 h1 r270
  text "MOSI" at 46.33,6.45 h1 r270
  text "CS" at 48.87,6.45 h1 r270
  text "CE" at 51.41,6.45 h1 r270
  text "GND" at 57.42,6.45 h1 r270
  text "SCL0" at 59.96,6.45 h1 r270
  text "SDA0" at 62.5,6.45 h1 r270
  text "TX1" at 68.96,6.45 h1 r270
  text "RX1" at 71.5,6.45 h1 r270
  text "GND" at 74.04,6.45 h1 r270
  text "TX0" at 80.71,6.45 h1 r270
  text "RX0" at 83.25,6.45 h1 r270
  text "GND" at 85.79,6.45 h1 r270
  text "BUZZ" at 33.449,1.8 h1.2
  text "nRF24L01P" at 50.658,1.8 h1.2
  text "RPI" at 61.86,1.8 h1.2
  text "BATTMON" at 75.999,1.8 h1.2
  text "SENSOR" at 87.149,1.8 h1.2
  text "POWER" at 19.719,1.301 h1.2